# Altium PCB CH565W-R0-1v1.PcbDoc (part 4 of 4)
Units mil, origin at the board's own origin, x right, y up, seen from the top; angles counter-clockwise.
Board outline 3947.04 x 3947.04 mil, 4 copper layers (Top Layer, Layer 1, Layer 2, Bottom Layer), stack 23.756 mil thick; 204 components, 168 nets, 932 pads, 1005 vias.
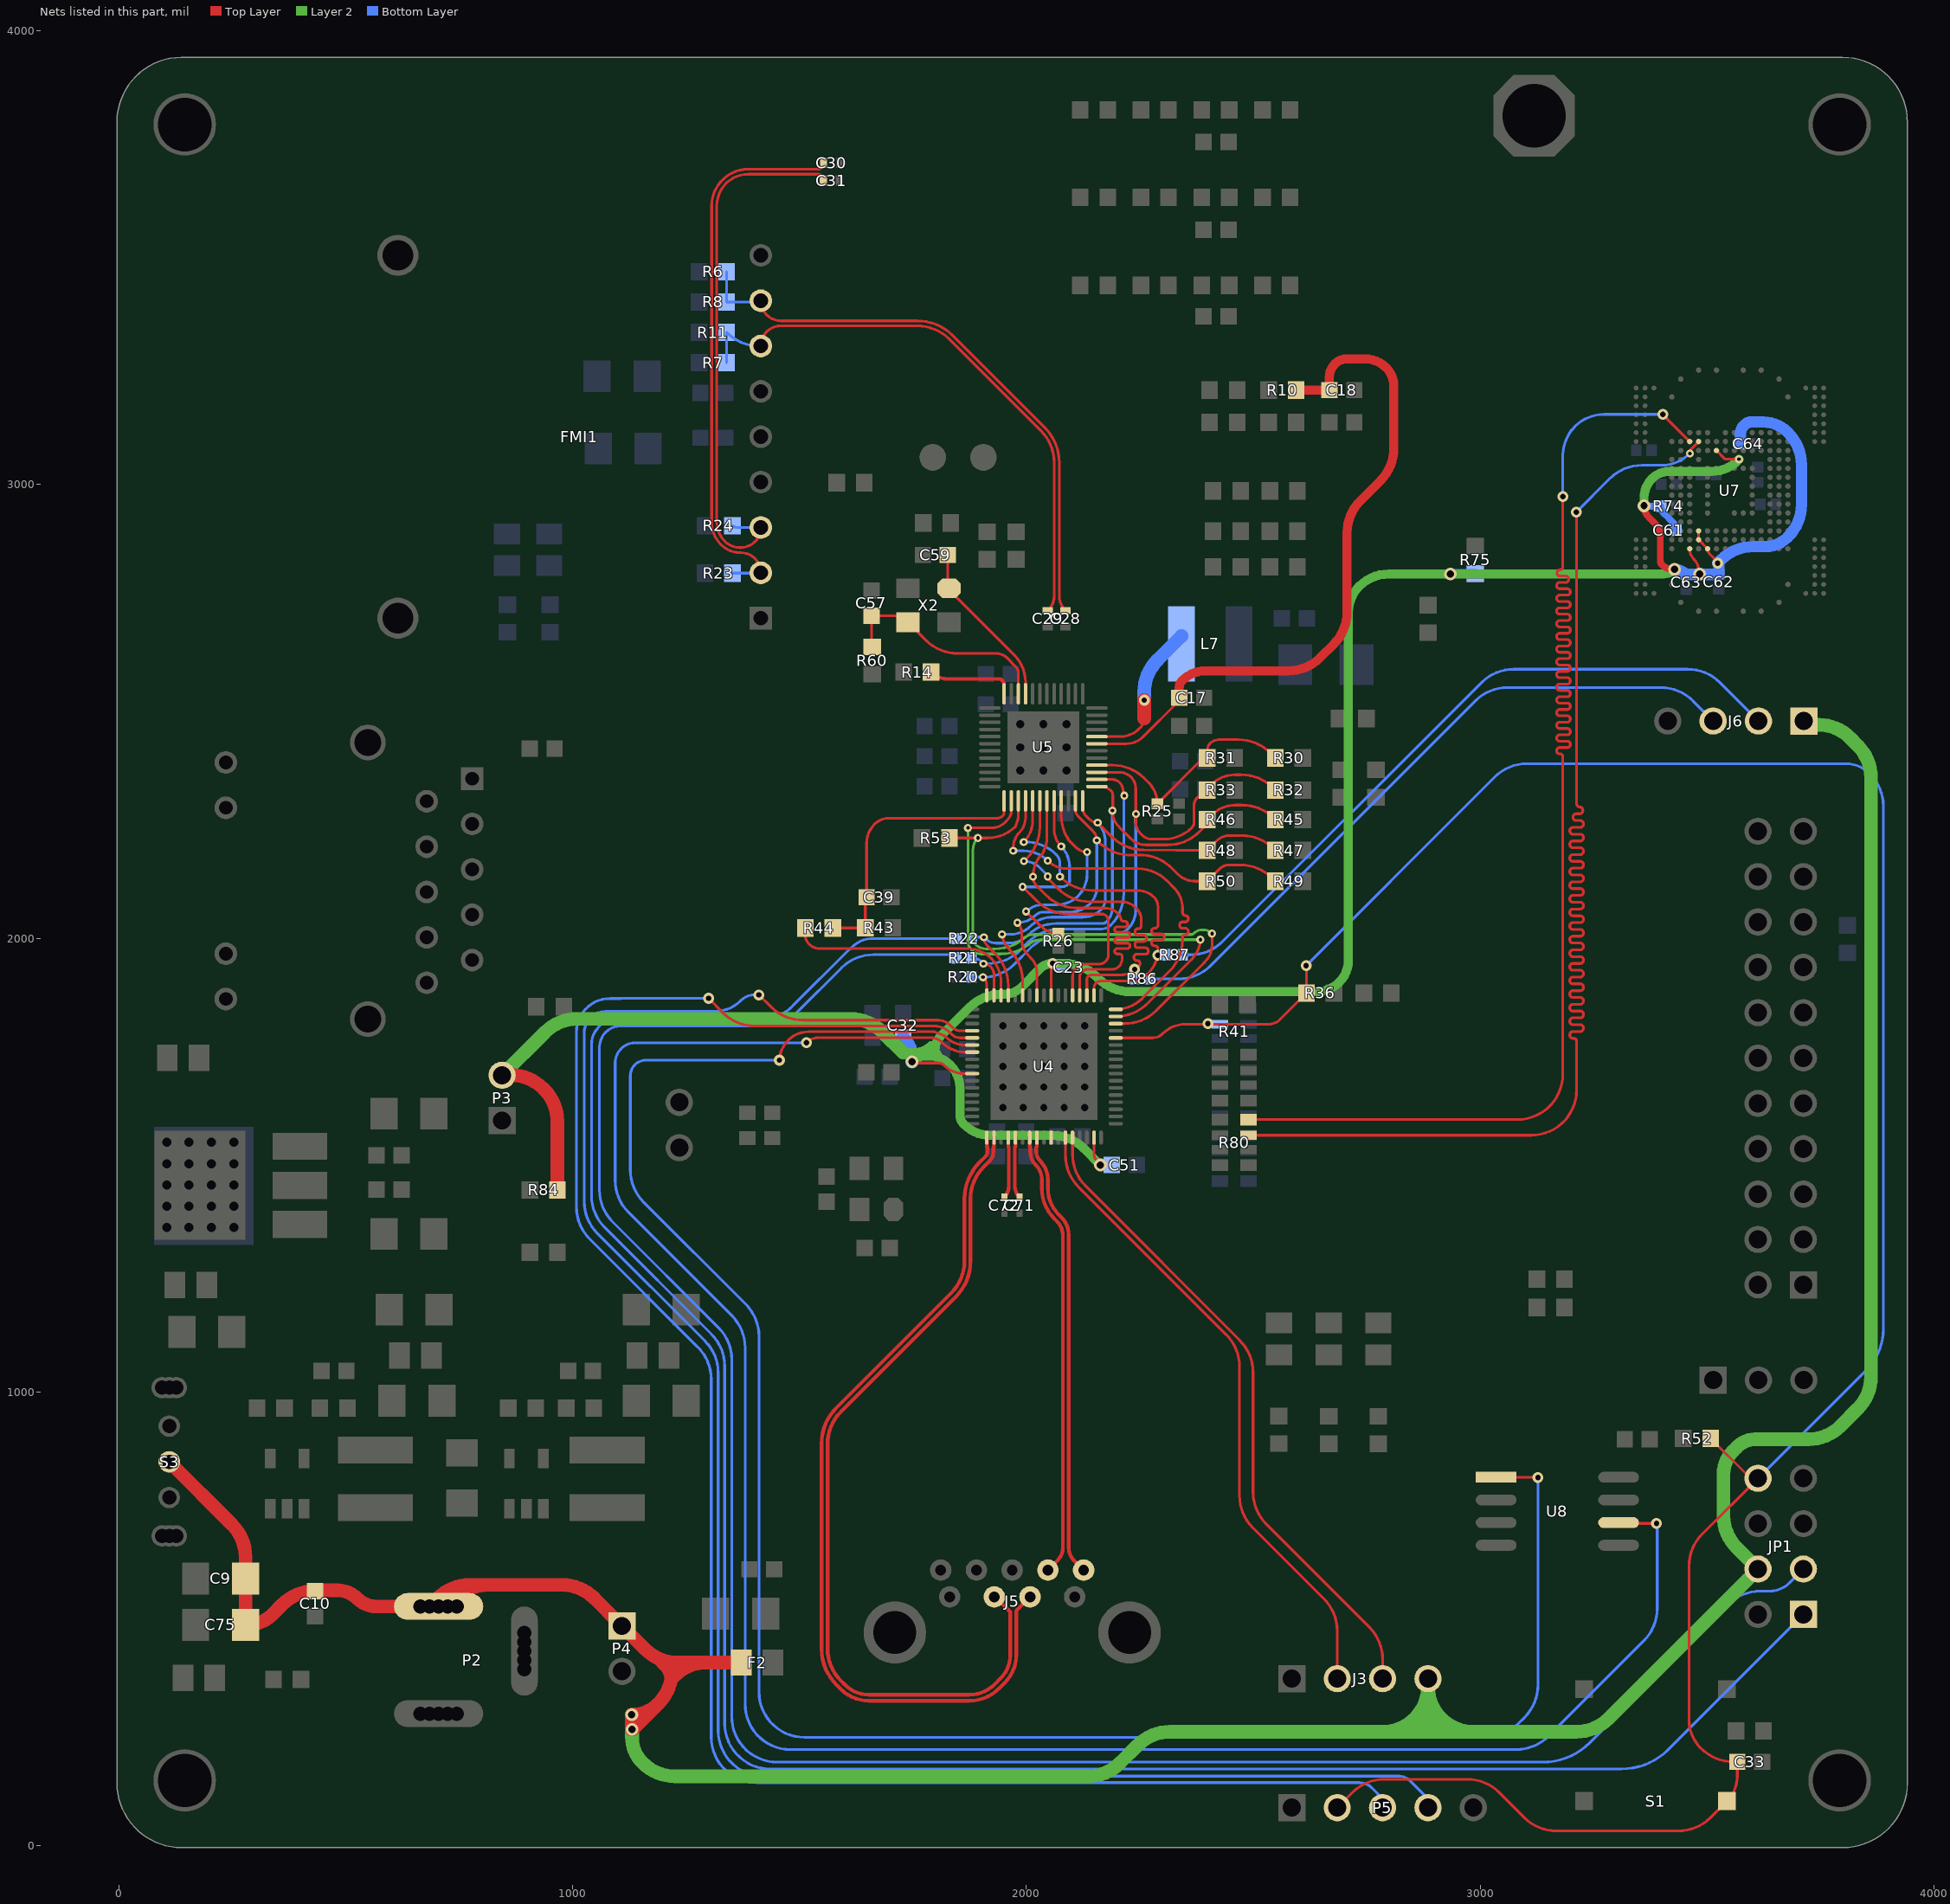
[diagram p6: the nets of this part, all layers, seen from the top]

## Via types
v1: diameter 17.72, hole 7.87, Top Layer to Bottom Layer, tented both sides, 564 vias
v2: diameter 24, hole 12, Top Layer to Bottom Layer, tented both sides, 371 vias
v3: diameter 28, hole 16, Top Layer to Bottom Layer, tented both sides, 64 vias
v4: diameter 26, hole 14, Top Layer to Bottom Layer, tented both sides, 2 vias
v5: diameter 19.68, hole 10, Top Layer to Bottom Layer, tented both sides, 1 vias
v6: diameter 20, hole 10, Top Layer to Bottom Layer, tented both sides, 1 vias
v7: diameter 32, hole 18, Top Layer to Bottom Layer, tented both sides, 1 vias
v8: diameter 17.72, hole 12, Top Layer to Bottom Layer, tented both sides, 1 vias

## Nets (pads, with @x,y where several pads share a name; then routed paths per layer and width w, separated by ;. In a path a pad name is that pad's centre, name@x,y a point inside that pad or via, vN(x,y) a via of type N, cw(c..) or ccw(c..) an arc to the next point about the centre after c; other vN are vias at no path point) (continued)
NetR80_7: R80.7 U7.J4 | length 3184.2
  Top Layer w6: R80.7@2489.51,1565.45 3112.82,1565.45 ccw(c3112.82,1665.45) 3212.82,1665.44 3212.82,1769.53 3212.82,1772.53 ccw(c3206.07,1772.53) 3206.07,1779.28 3204.57,1779.28 cw(c3204.57,1786.03) 3197.82,1786.03 3197.82,1787.53 cw(c3204.57,1787.53) 3204.57,1794.28 3221.07,1794.28 ccw(c3221.07,1801.03) 3227.82,1801.03 3227.82,1802.53 ccw(c3221.07,1802.53) 3221.07,1809.28 3204.57,1809.28 cw(c3204.57,1816.03) 3197.82,1816.03 3197.82,1817.53 cw(c3204.57,1817.53) 3204.57,1824.28 3221.07,1824.28 ccw(c3221.07,1831.03) 3227.82,1831.03 3227.82,1832.53 ccw(c3221.07,1832.53) 3221.07,1839.28 3204.57,1839.28 cw(c3204.57,1846.03) 3197.82,1846.03 3197.82,1847.53 cw(c3204.57,1847.53) 3204.57,1854.28 3221.07,1854.28 ccw(c3221.07,1861.03) 3227.82,1861.03 3227.82,1862.53 ccw(c3221.07,1862.53) 3221.07,1869.28 3204.57,1869.28 cw(c3204.57,1876.03) 3197.82,1876.03 3197.82,1877.53 cw(c3204.57,1877.53) 3204.57,1884.28 3221.07,1884.28 ccw(c3221.07,1891.03) 3227.82,1891.03 3227.82,1892.53 ccw(c3221.07,1892.53) 3221.07,1899.28 3204.57,1899.28 cw(c3204.57,1906.03) 3197.82,1906.03 3197.82,1907.53 cw(c3204.57,1907.53) 3204.57,1914.28 3221.07,1914.28 ccw(c3221.07,1921.03) 3227.82,1921.03 3227.82,1922.53 ccw(c3221.07,1922.53) 3221.07,1929.28 3204.57,1929.28 cw(c3204.57,1936.03) 3197.82,1936.03 3197.82,1937.53 cw(c3204.57,1937.53) 3204.57,1944.28 3221.07,1944.28 ccw(c3221.07,1951.03) 3227.82,1951.03 3227.82,1952.53 ccw(c3221.07,1952.53) 3221.07,1959.28 3204.57,1959.28 cw(c3204.57,1966.03) 3197.82,1966.03 3197.82,1967.53 cw(c3204.57,1967.53) 3204.57,1974.28 3221.07,1974.28 ccw(c3221.07,1981.03) 3227.82,1981.03 3227.82,1982.53 ccw(c3221.07,1982.53) 3221.07,1989.28 3204.57,1989.28 cw(c3204.57,1996.03) 3197.82,1996.03 3197.82,1997.53 cw(c3204.57,1997.53) 3204.57,2004.28 3221.07,2004.28 ccw(c3221.07,2011.03) 3227.82,2011.03 3227.82,2012.53 ccw(c3221.07,2012.53) 3221.07,2019.28 3204.57,2019.28 cw(c3204.57,2026.03) 3197.82,2026.03 3197.82,2027.53 cw(c3204.57,2027.53) 3204.57,2034.28 3221.07,2034.28 ccw(c3221.07,2041.03) 3227.82,2041.03 3227.82,2042.53 ccw(c3221.07,2042.53) 3221.07,2049.28 3204.57,2049.28 cw(c3204.57,2056.03) 3197.82,2056.03 3197.82,2057.53 cw(c3204.57,2057.53) 3204.57,2064.28 3221.07,2064.28 ccw(c3221.07,2071.03) 3227.82,2071.03 3227.82,2072.53 ccw(c3221.07,2072.53) 3221.07,2079.28 3204.57,2079.28 cw(c3204.57,2086.03) 3197.82,2086.03 3197.82,2087.53 cw(c3204.57,2087.53) 3204.57,2094.28 3221.07,2094.28 ccw(c3221.07,2101.03) 3227.82,2101.03 3227.82,2102.53 ccw(c3221.07,2102.53) 3221.07,2109.28 3204.57,2109.28 cw(c3204.57,2116.03) 3197.82,2116.03 3197.82,2117.53 cw(c3204.57,2117.53) 3204.57,2124.28 3221.07,2124.28 ccw(c3221.07,2131.03) 3227.82,2131.03 3227.82,2132.53 ccw(c3221.07,2132.53) 3221.07,2139.28 3204.57,2139.28 cw(c3204.57,2146.03) 3197.82,2146.03 3197.82,2147.53 cw(c3204.57,2147.53) 3204.57,2154.28 3221.07,2154.28 ccw(c3221.07,2161.03) 3227.82,2161.03 3227.82,2162.53 ccw(c3221.07,2162.53) 3221.07,2169.28 3204.57,2169.28 cw(c3204.57,2176.03) 3197.82,2176.03 3197.82,2177.53 cw(c3204.57,2177.53) 3204.57,2184.28 3221.07,2184.28 ccw(c3221.07,2191.03) 3227.82,2191.03 3227.82,2192.53 ccw(c3221.07,2192.53) 3221.07,2199.28 3204.57,2199.28 cw(c3204.57,2206.03) 3197.82,2206.03 3197.82,2207.53 cw(c3204.57,2207.53) 3204.57,2214.28 3221.07,2214.28 ccw(c3221.07,2221.03) 3227.82,2221.03 3227.82,2222.53 ccw(c3221.07,2222.53) 3221.07,2229.28 3204.57,2229.28 cw(c3204.57,2236.03) 3197.82,2236.03 3197.82,2237.53 cw(c3204.57,2237.53) 3204.57,2244.28 3221.07,2244.28 ccw(c3221.07,2251.03) 3227.82,2251.03 3227.82,2252.53 ccw(c3221.07,2252.53) 3221.07,2259.28 3211.72,2259.28 cw(c3211.72,2266.03) 3204.97,2266.03 3204.97,2267.53 cw(c3211.72,2267.53) 3211.72,2274.28 3219.57,2274.28 ccw(c3219.57,2281.03) 3226.32,2281.03 3226.32,2282.53 ccw(c3219.57,2282.53) 3219.57,2289.28 cw(c3219.57,2296.03) 3212.82,2296.03 3212.82,2345.59 3212.82,2348.59 v2@3212.82,2939.27 ; v1(3462.46,3068.75) 3464.7,3070.99 3464.7,3077.76 U7.J4@3481.78,3094.85
  Bottom Layer w6: v2(3211.9,2939.27) 3285.85,3013.21 cw(c3356.56,2942.5) 3356.56,3042.5 3399.09,3042.5 ccw(c3399.09,3132.11) v1(3462.46,3068.75)
NetR80_8: R80.8 U7.J3 | length 3166.7
  Top Layer w6: R80.8@2489.51,1600.1 3082.41,1600.1 ccw(c3082.41,1700.1) 3182.41,1700.1 3182.41,2397 3182.41,2400 ccw(c3176.11,2400) 3176.11,2406.3 3175.12,2406.3 cw(c3175.12,2412.6) 3168.82,2412.6 3168.82,2414 cw(c3175.12,2414) 3175.12,2420.3 3192.52,2420.3 ccw(c3192.52,2426.6) 3198.82,2426.6 3198.82,2428 ccw(c3192.52,2428) 3192.52,2434.3 3175.12,2434.3 cw(c3175.12,2440.6) 3168.82,2440.6 3168.82,2442 cw(c3175.12,2442) 3175.12,2448.3 3192.52,2448.3 ccw(c3192.52,2454.6) 3198.82,2454.6 3198.82,2456 ccw(c3192.52,2456) 3192.52,2462.3 3175.12,2462.3 cw(c3175.12,2468.6) 3168.82,2468.6 3168.82,2470 cw(c3175.12,2470) 3175.12,2476.3 3192.52,2476.3 ccw(c3192.52,2482.6) 3198.82,2482.6 3198.82,2484 ccw(c3192.52,2484) 3192.52,2490.3 3175.12,2490.3 cw(c3175.12,2496.6) 3168.82,2496.6 3168.82,2498 cw(c3175.12,2498) 3175.12,2504.3 3192.52,2504.3 ccw(c3192.52,2510.6) 3198.82,2510.6 3198.82,2512 ccw(c3192.52,2512) 3192.52,2518.3 3175.12,2518.3 cw(c3175.12,2524.6) 3168.82,2524.6 3168.82,2526 cw(c3175.12,2526) 3175.12,2532.3 3192.52,2532.3 ccw(c3192.52,2538.6) 3198.82,2538.6 3198.82,2540 ccw(c3192.52,2540) 3192.52,2546.3 3175.12,2546.3 cw(c3175.12,2552.6) 3168.82,2552.6 3168.82,2554 cw(c3175.12,2554) 3175.12,2560.3 3192.52,2560.3 ccw(c3192.52,2566.6) 3198.82,2566.6 3198.82,2568 ccw(c3192.52,2568) 3192.52,2574.3 3175.12,2574.3 cw(c3175.12,2580.6) 3168.82,2580.6 3168.82,2582 cw(c3175.12,2582) 3175.12,2588.3 3192.52,2588.3 ccw(c3192.52,2594.6) 3198.82,2594.6 3198.82,2596 ccw(c3192.52,2596) 3192.52,2602.3 3175.12,2602.3 cw(c3175.12,2608.6) 3168.82,2608.6 3168.82,2610 cw(c3175.12,2610) 3175.12,2616.3 3192.52,2616.3 ccw(c3192.52,2622.6) 3198.82,2622.6 3198.82,2624 ccw(c3192.52,2624) 3192.52,2630.3 3175.12,2630.3 cw(c3175.12,2636.6) 3168.82,2636.6 3168.82,2638 cw(c3175.12,2638) 3175.12,2644.3 3192.52,2644.3 ccw(c3192.52,2650.6) 3198.82,2650.6 3198.82,2652 ccw(c3192.52,2652) 3192.52,2658.3 3175.12,2658.3 cw(c3175.12,2664.6) 3168.82,2664.6 3168.82,2666 cw(c3175.12,2666) 3175.12,2672.3 3192.52,2672.3 ccw(c3192.52,2678.6) 3198.82,2678.6 3198.82,2680 ccw(c3192.52,2680) 3192.52,2686.3 3175.12,2686.3 cw(c3175.12,2692.6) 3168.82,2692.6 3168.82,2694 cw(c3175.12,2694) 3175.12,2700.3 3192.52,2700.3 ccw(c3192.52,2706.6) 3198.82,2706.6 3198.82,2708 ccw(c3192.52,2708) 3192.52,2714.3 3175.12,2714.3 cw(c3175.12,2720.6) 3168.82,2720.6 3168.82,2722 cw(c3175.12,2722) 3175.12,2728.3 3192.52,2728.3 ccw(c3192.52,2734.6) 3198.82,2734.6 3198.82,2736 ccw(c3192.52,2736) 3192.52,2742.3 3175.12,2742.3 cw(c3175.12,2748.6) 3168.82,2748.6 3168.82,2750 cw(c3175.12,2750) 3175.12,2756.3 3192.52,2756.3 ccw(c3192.52,2762.6) 3198.82,2762.6 3198.82,2764 ccw(c3192.52,2764) 3192.52,2770.3 3175.12,2770.3 cw(c3175.12,2776.6) 3168.82,2776.6 3168.82,2778 cw(c3175.12,2778) 3175.12,2784.3 3188.9,2784.3 ccw(c3188.9,2790.6) 3195.2,2790.6 3195.2,2792 ccw(c3188.9,2792) 3188.9,2798.3 3176.11,2798.3 cw(c3176.11,2804.6) 3169.81,2804.6 3169.81,2806 cw(c3176.11,2806) 3176.11,2812.3 ccw(c3176.11,2818.6) 3182.41,2818.6 3182.41,2937.19 v2(3182.41,2973.49) ; v2(3402.8,3154.97) 3402.8,3154.16 U7.J3@3462.1,3094.85
  Bottom Layer w6: v2(3182.41,2973.49) 3182.41,3064.16 cw(c3273.22,3064.16) 3273.22,3154.97 v2(3402.8,3154.97)
PA19: U4.10
PB24: R44.2 U4.49 | length 535
  Top Layer w6: R44.2@1512.38,2022.43 1512.38,2007.08 ccw(c1540.98,2007.08) 1520.75,1986.86 ccw(c1544.85,2010.95) 1544.85,1976.88 1870.85,1976.88 cw(c1870.85,1904.71) 1921.89,1955.74 cw(c1868.24,1902.09) 1944.11,1902.09 U4.49@1944.11,1873.9
PHYRSTB: C39.2 R43.1 R44.1 U5.13 | length 621.3
  Top Layer w6: R44.1@1573.01,2022.43 1642.99,2022.43 ccw(c1642.99,2024.94) R43.1@1644.77,2023.17 1644.77,2083.54 cw(c1654.35,2083.54) C39.2@1647.57,2090.31 1647.57,2189.92 1647.57,2209.43 cw(c1706.65,2209.43) 1664.88,2251.21 cw(c1697.2,2218.88) 1697.2,2264.59 1745.25,2264.59 1935.08,2264.59 ccw(c1935.08,2282.62) 1947.83,2269.87 ccw(c1941.09,2276.61) 1950.62,2276.61 U5.13@1950.62,2297.13
POW: C9.2 C10.2 C75.2 F2.2 J3.4 J6.1 JP1.4 P2.1 P4.1 S3.1 | length 7815.1
  Top Layer w30: S3.1@110.18,845.58 249.02,706.74 cw(c178.31,636.03) 278.31,636.03 C9.2@278.31,588.13 C75.2@278.31,486.14 282.16,486.14 ccw(c282.16,564.49) 337.56,509.09 359.63,531.15 cw(c430.34,460.44) 430.34,560.44 C10.2@431.73,560.44 ; C10.2@431.73,562.32 481.16,562.32 cw(c481.16,500.89) 524.6,544.33 ccw(c567.23,586.96) 567.23,526.67 P2.1@664.07,526.67 P2.1@684.07,526.67 ; P2.1@684.07,540.95 P2.1@684.07,526.67 ; P2.1@704.07,526.67 722.44,545.04 cw(c793.15,474.33) 793.15,574.33 ; P2.1@724.07,526.67 742.44,545.04 cw(c813.15,474.33) 813.15,574.33 ; 1187.97,311.98 1188.86,312.87 ccw(c1118.15,383.58) 1216.67,366.44 ; F2.2@1371.15,402.99 1294.64,402.99 ; P2.1@684.07,526.67 702.44,545.04 cw(c773.15,474.33) 773.15,574.33 793.15,574.33 ; 793.15,574.33 813.15,574.33 ; 813.15,574.33 976.1,574.33 cw(c976.1,474.33) 1046.81,545.04 P4.1@1108.22,483.63 1159.57,432.28 ccw(c1230.28,502.99) 1189.19,411.82 ; 1189.19,411.82 ccw(c1230.28,502.99) 1230.28,402.99 1237.56,402.99 ; 1189.19,411.82 1204.02,396.99 cw(c1173.47,366.44) 1216.67,366.44 ; 1216.67,366.44 ccw(c1118.15,383.58) 1218.15,383.58 cw(c1237.56,383.58) 1237.56,402.99 ; 1216.67,366.44 1223.93,373.7 cw(c1294.64,302.99) 1294.64,402.99 ; 1237.56,402.99 1294.64,402.99 ; v3(1129.84,287.9) ccw(c1129.84,370.1) 1187.94,311.95 1132.76,256.77 cw(c1130.21,259.32) v3(1130.21,255.71) 1130.21,287.54 v3(1129.84,287.9)
  Layer 2 w30: v3(1129.84,287.9) cw(c1126.07,284.13) 1131.41,284.13 1131.41,224.96 ; v3(1130.21,255.71) 1130.21,238.8 ccw(c1210.53,238.8) 1131.41,224.96 ; J3.4@2885.09,367.45 J3.4@2885.09,350.37 ; J6.1@3713.66,2478.72 3713.66,2470.27 3747,2470.27 cw(c3747,2373.81) 3815.2,2442.02 3832.46,2424.76 cw(c3761.75,2354.05) 3861.75,2354.05 3861.75,1033.06 cw(c3761.75,1033.06) 3832.46,962.35 3794.57,924.46 cw(c3723.86,995.17) 3723.86,895.17 3606.65,895.17 ccw(c3606.65,839.43) 3567.23,878.85 3557.83,869.44 ccw(c3608.84,818.44) 3536.7,818.44 3536.7,726.61 ccw(c3636.7,726.61) 3565.99,655.9 JP1.4@3612.66,609.23 3283.09,279.66 cw(c3212.38,350.37) 3212.38,250.37 2985.09,250.37 ; 1131.41,224.96 ccw(c1210.53,238.8) 1153.73,182 1154.11,181.62 ccw(c1224.82,252.33) 1224.82,152.33 2135.56,152.33 ccw(c2135.56,252.33) 2206.27,181.62 2245.73,221.08 cw(c2316.44,150.37) 2316.44,250.37 2785.09,250.37 ; 2785.09,250.37 ccw(c2785.09,350.37) J3.4@2885.09,350.37 ; 2785.09,250.37 2853.49,250.37 ; 2853.49,250.37 ccw(c2853.49,281.96) 2885.09,281.96 2885.09,299.15 ; 2853.49,250.37 2933.87,250.37 ; 2885.09,299.15 ccw(c2933.87,299.15) 2933.87,250.37 ; 2885.09,299.15 J3.4@2885.09,350.37 ; J3.4@2885.09,350.37 ccw(c2985.09,350.37) 2985.09,250.37 ; 2933.87,250.37 2985.09,250.37
REGOUT: L7.1 U5.32 | length 362
  Top Layer w6: U5.32@2155.35,2444.41 2206.47,2444.41 ccw(c2206.47,2504.19) 2248.74,2461.92 ccw(c2204.49,2506.17) 2267.07,2506.17 2267.07,2509.74
  Top Layer w30: 2259.69,2484.21 v2(2259.69,2524.71)
  Bottom Layer w30: v2(2259.69,2524.71) 2259.69,2542.66 cw(c2359.69,2542.66) 2288.98,2613.37 L7.1@2341.44,2665.83
RGMII_MDC: U4.33 U5.14 | length 1207.3
  Top Layer w6: v1(1871,2243) 1924.08,2243 1924.37,2243.29 ccw(c1924.37,2281.73) 1951.55,2254.55 ; 1951.56,2254.57 1959.29,2262.29 ; 1959.3,2262.3 ccw(c1942.19,2279.39) 1962.44,2266.18 ccw(c1942.19,2279.39) 1966.37,2279.39 U5.14@1966.37,2302.68 ; U4.33@2196.78,1827.36 ccw(c2196.78,1927) 2267.23,1856.54 2363.6,1952.91 ccw(c2314.1,2002.42) v1@2384.11,2002.42
  Layer 2 w6: v1(1871,2243) 1871,1993.43 ccw(c1899,1993.43) 1879.2,1973.63 ccw(c1899.3,1993.73) 1899.29,1965.3 1944,1965.3 ccw(c1944,2065.3) 2004.21,1985.46 ; v1(2383.28,1996.84) 2386.18,1993.94 ccw(c2379.17,1986.92) 2379.17,1996.84 2031.69,1996.84 ccw(c2031.69,1957.98) 2010.24,1990.39 ; 2004.21,1985.46 ccw(c1944,2065.3) 2010.24,1990.39 ; 2004.21,1985.46 cw(c2031.69,1957.98) 2010.24,1990.39
RGMII_MDIO: R53.2 U4.32 U5.15 | length 1306.6
  Top Layer w6: R53.2@1830.07,2220.81 1914.42,2220.81 ccw(c1914.42,2307.37) 1975.63,2246.16 ccw(c1920.26,2273.74) 1982.12,2273.74 U5.15@1982.12,2302.68 ; U4.32@2196.78,1811.61 2216.3,1811.61 ccw(c2216.3,1911.61) 2287.01,1840.9 2387.37,1941.26 ccw(c2316.66,2011.97) 2394.78,1949.54 ccw(c2360.44,1983.87) 2405.96,1966.95 ccw(c2360.44,1983.87) 2409,1983.87 v1(2409,2010)
  Layer 2 w6: v1(1893,2221) ccw(c1919.56,2194.44) 1882,2194.44 1882,2001.36 ccw(c1904.69,2001.36) 1888.64,1985.32 ccw(c1909.84,2006.52) 1909.84,1976.54 1930.17,1976.54 ccw(c1930.17,2076.54) 1996.78,2001.96 ; 1992.54,1998.37 cw(c2015.88,1975.03) 1996.78,2001.96 ; v1(2409,2010) ccw(c2386.59,1987.59) 2393.97,2018.41 2388.01,2018.41 ccw(c2388.01,1990.69) 2368.41,2010.29 cw(c2362.98,2015.73) 2362.98,2008.04 2015.88,2008.04 ccw(c2015.88,1975.03) 1996.78,2001.96
RGMII_RXC: R25.2 R30.2 R31.1 U5.28 | length 519.8
  Top Layer w6: U5.28@2155.35,2381.42 2189.52,2381.42 cw(c2189.52,2281.42) 2260.23,2352.13 2269.2,2343.16 cw(c2222.61,2296.57) R25.2@2288.5,2296.57 2383.21,2391.28 cw(c2398.43,2376.05) R31.1@2398.43,2397.59 2398.43,2413.55 cw(c2421.43,2413.55) 2405.17,2429.81 cw(c2424.04,2410.94) 2424.04,2437.62 2467.13,2437.62 cw(c2467.13,2337.62) 2537.84,2408.33 R30.2@2548.59,2397.59
RGMII_RXD0: R21.1 U4.50 U5.26 | length 795.6
  Top Layer w6: v1(1905.2,1943.91) cw(c1905.2,1921.68) 1920.92,1937.4 cw(c1902.98,1919.46) 1928.36,1919.46 U4.50@1928.36,1873.9 ; U5.26@2155.35,2349.93 2188.26,2349.93 cw(c2188.26,2324.79) 2206.04,2342.56 cw(c2190.38,2326.91) 2212.52,2326.91 v1@2212.52,2314.19
  Bottom Layer w6: R21.1@1878.52,1957.02 cw(c1878.52,1924.24) 1901.7,1947.42 v1(1905.2,1943.91) 1914.97,1943.91 ccw(c1914.97,2043.91) 1985.68,1973.2 2003.59,1991.11 cw(c2074.3,1920.4) 2074.3,2020.4 2166.88,2020.4 ccw(c2166.88,2046.35) 2185.23,2028 ccw(c2114.52,2098.71) 2214.52,2098.71 v1@2214.52,2314.19
  other v1: 2215.52,2314.19
RGMII_RXD1: R22.1 R45.2 R46.1 U4.48 U5.25 | length 1223.9
  Top Layer w6: v1(1905.97,2002.04) ccw(c1932.45,2002.04) 1913.73,1983.32 1930.56,1966.48 cw(c1859.85,1895.77) 1959.85,1895.77 U4.48@1959.85,1873.9 ; U5.25@2155.35,2334.18 2163.85,2334.18 cw(c2163.85,2301.73) 2186.8,2324.67 cw(c2178.22,2316.1) 2190.35,2316.1 v1@2190.35,2281.15 ; v1(2189.35,2281.15) ccw(c2240.43,2281.15) 2204.31,2245.04 2230.69,2218.67 ccw(c2262.13,2250.11) 2262.13,2205.64 2311.08,2205.64 ccw(c2311.08,2305.64) 2381.79,2234.93 2398.43,2251.58 cw(c2403.74,2251.58) R46.1@2399.98,2255.32 ; R46.1@2398.43,2261.58 2408.7,2271.85 cw(c2460.89,2219.66) 2460.89,2293.46 2475.28,2293.46 cw(c2475.28,2193.46) 2545.99,2264.17 R45.2@2548.59,2261.58 ; R45.2@2548.37,2251.79 R45.2@2548.59,2251.58
  Bottom Layer w6: R22.1@1879.11,1999.15 cw(c1887.36,1990.89) 1887.36,2002.57 1905.97,2002.57 1909.7,1998.84 ccw(c1933.3,2022.44) 1933.3,1989.06 1960.74,1989.06 ccw(c1960.74,2049.37) 2003.38,2006.73 cw(c2065.25,1944.86) 2065.25,2032.36 2167.01,2032.36 ccw(c2167.01,2046.23) 2176.81,2036.42 ccw(c2146.54,2066.69) 2189.35,2066.69 v1(2189.35,2281.15)
RGMII_RXD2: R47.2 R48.1 U4.46 U5.24 | length 1081
  Top Layer w6: v1(1946.21,2008.38) ccw(c2001.06,2014.78) 1962.02,1975.74 cw(c1957.77,1971.51) 1963.2,1974.06 cw(c1895.23,1906.1) 1991.35,1906.1 U4.46@1991.35,1873.9 ; U5.24@2123.85,2302.68 2123.85,2286.6 ccw(c2146.35,2286.6) 2125.74,2277.56 ccw(c2146.35,2286.6) 2130.44,2270.69 2138.9,2262.23 ccw(c2156.99,2280.32) v1(2156.99,2254.74) 2187.8,2223.93 ccw(c2258.51,2294.64) 2189.72,2222.06 ccw(c2258.51,2294.64) 2258.51,2194.64 cw(c2258.51,2188.64) 2258.6,2194.64 2398.43,2193.18 R48.1@2398.48,2193.17 ; R48.1@2398.43,2188.57 R48.1@2400.93,2191.07 ; R48.1@2398.43,2193.57 2419.69,2214.83 cw(c2447.24,2187.28) 2447.24,2226.24 2474.49,2226.24 cw(c2474.49,2126.24) 2545.2,2196.95 R47.2@2548.59,2193.57 ; R47.2@2548.45,2188.71 R47.2@2548.59,2188.57
  Bottom Layer w6: v1(1946.21,2008.38) 1963.48,2008.38 ccw(c1963.48,2075.18) 2010.71,2027.95 cw(c2054.88,1983.78) 2054.88,2046.24 2123.69,2046.24 ccw(c2123.69,2104.35) 2164.77,2063.26 ccw(c2143.93,2084.11) 2173.41,2084.11 2173.41,2215.1 ccw(c2117.35,2215.1) 2170.67,2232.4 ccw(c2117.35,2215.1) v1(2156.99,2254.74)
RGMII_RXD3: R49.2 R50.1 U4.44 U5.23 | length 1039.2
  Top Layer w6: v1(1980.11,2034.15) cw(c1956.73,2010.77) 1989.79,2010.77 1989.79,1994.93 ccw(c2034.68,1994.93) 2002.94,1963.18 2010.28,1955.84 ; 2010.31,1955.81 cw(c1979.95,1925.51) 2022.85,1925.51 U4.44@2022.85,1873.9 ; U5.23@2108.1,2302.68 2108.1,2283.07 ccw(c2128.79,2283.07) 2114.16,2268.45 2146.73,2235.88 cw(c2126.67,2215.82) 2155.04,2215.82 2158.5,2212.35 ccw(c2229.21,2283.06) 2216.03,2183.93 ccw(c2229.21,2283.06) 2229.21,2183.06 2249.83,2183.06 ; 2249.83,2183.67 cw(c2249.83,2083.67) 2320.54,2154.38 2333.88,2141.05 ccw(c2371.26,2178.44) 2371.26,2125.57 R50.1@2398.43,2125.57 ; R50.1@2399.78,2126.12 ccw(c2399.78,2124.22) R50.1@2398.43,2125.57 ; R49.2@2534.74,2127.17 cw(c2531.62,2122.04) R49.2@2535.79,2126.36 ; R49.2@2548.59,2125.57 2541.95,2132.2 ccw(c2471.24,2061.49) 2471.24,2161.49 2447.02,2161.49 ccw(c2447.02,2130.92) 2425.4,2152.54 R50.1@2398.43,2125.57
  Bottom Layer w6: v1(1980.11,2034.15) ccw(c1980.11,2091.39) 2020.58,2050.91 cw(c2036.32,2035.17) 2036.32,2057.43 2094.78,2057.43 ccw(c2094.78,2121.85) 2140.33,2076.3 ccw(c2104.82,2111.81) 2155.04,2111.81 v1(2155.04,2215.81)
RGMII_RXDV: R20.1 R32.2 R33.1 U4.51 U5.27 | length 1274.3
  Top Layer w6: v1(1904.17,1913.87) v1@1906.35,1911.69 ; v1@1906.36,1911.68 cw(c1891.23,1896.58) 1912.61,1896.58 U4.51@1912.61,1873.9 ; U5.27@2155.35,2365.67 2205.11,2365.67 cw(c2205.11,2330.04) 2230.31,2355.24 cw(c2204.41,2329.35) 2241.03,2329.35 2241.03,2255.21 ccw(c2274.2,2255.21) 2241.07,2253.52 ccw(c2274.2,2255.21) 2250.75,2231.76 2255.66,2226.84 ccw(c2276.33,2247.51) 2276.33,2218.28 2303.29,2218.28 ccw(c2303.29,2305.2) 2364.76,2243.74 ccw(c2353.42,2255.08) 2369.45,2255.08 2369.45,2292.92 cw(c2392.89,2292.92) 2376.32,2309.5 cw(c2388.59,2297.22) 2388.59,2314.58 ccw(c2388.59,2326.98) R33.1@2397.36,2318.21 ; R33.1@2398.43,2329.58 2407.07,2338.22 cw(c2460.47,2284.81) 2412.17,2342.87 cw(c2460.47,2284.81) 2439.18,2357.27 cw(c2460.47,2284.81) 2460.47,2360.34 2473.41,2360.34 cw(c2473.41,2260.34) 2544.12,2331.05 R32.2@2548.59,2326.58
  Bottom Layer w6: R20.1@1878.26,1914.38 1902.93,1914.38 cw(c1902.93,1912.63) v1(1904.17,1913.87) ccw(c1904.17,2011.04) 1972.88,1942.33 2009.71,1979.15 cw(c2080.42,1908.44) 2080.42,2008.44 2194.57,2008.44 ccw(c2194.57,2049.8) 2223.82,2020.55 ccw(c2182.26,2062.11) 2241.03,2062.11 v1@2241.03,2274.73
  other v1: 2241.27,2273.78
RGMII_TXC: R26.1 U5.21 | length 454.9
  Top Layer w6: v1(1999,2059) 2030.93,2027.07 ccw(c2070.34,2066.47) R26.1@2070.34,2010.74 ; U5.21@2076.61,2302.68 2076.61,2271.32 ccw(c2175.85,2271.32) 2093.76,2215.54 2109.38,2199.92 ccw(c2133.68,2224.22) v1(2133.68,2189.86)
  Bottom Layer w6: v1(1999,2059) 2001.14,2059 2002.6,2060.47 cw(c2033.9,2029.17) 2033.9,2073.43 2066.42,2073.43 ccw(c2066.42,2140.5) 2067.99,2073.45 ccw(c2066.42,2140.5) 2113.84,2093.07 ccw(c2065.96,2140.96) 2123.95,2106 ccw(c2065.96,2140.96) 2133.68,2140.96 v1(2133.68,2189.86)
RGMII_TXD0: U4.38 U5.19 | length 814.7
  Top Layer w6: U5.19@2045.11,2302.68 2045.11,2221.89 cw(c1976.86,2221.89) 2035.06,2186.24 ccw(c2085,2136.31) 2024.92,2173.43 ccw(c2085,2136.31) 2014.38,2136.31 v1(2014.38,2135.57) ccw(c2044.14,2135.57) 2023.1,2114.53 2042.03,2095.59 ccw(c2112.74,2166.31) 2104.85,2066.62 ccw(c2112.74,2166.31) 2112.74,2066.31 2171.45,2066.31 cw(c2171.45,2021.65) 2199.12,2056.7 cw(c2171.45,2021.65) 2202.55,2053.7 2203.03,2053.23 2205.63,2050.23 2208.63,2041.22 ccw(c2214.32,2043.12) 2214.32,2037.12 2216.97,2037.12 cw(c2216.97,2031.12) 2216.97,2025.12 2200.23,2025.12 ccw(c2200.23,2019.12) 2200.23,2013.12 2222.23,2013.12 cw(c2222.23,2007.12) 2222.23,2001.12 2200.23,2001.12 ccw(c2200.23,1995.12) 2200.23,1989.12 2222.23,1989.12 cw(c2222.23,1983.12) 2222.23,1977.12 2200.23,1977.12 ccw(c2200.23,1971.12) 2200.23,1965.12 2205.23,1965.12 cw(c2205.23,1959.12) 2211.23,1959.12 2211.23,1956.12 cw(c2184.69,1956.12) 2203.46,1937.35 cw(c2189.47,1951.34) 2189.47,1931.55 2134.43,1931.55 ccw(c2134.43,1914.46) 2117.33,1914.46 U4.38@2117.33,1873.9
RGMII_TXD1: R86.2 U4.37 U5.18 | length 844.9
  Top Layer w6: v1@1997.88,2172.71 2000.07,2174.9 ccw(c1929.36,2245.61) 2029.36,2245.61 U5.18@2029.36,2302.68 ; v1(2047,2136) 2047,2131.8 2069.14,2109.66 ccw(c2139.85,2180.37) 2102.62,2087.56 ccw(c2139.85,2180.37) 2139.85,2080.37 2209.91,2080.37 cw(c2209.91,2037.36) 2240.32,2067.77 2243.48,2064.61 cw(c2220.67,2041.8) 2252.93,2041.8 2252.93,2027.05 cw(c2246.63,2027.05) 2246.63,2020.75 2245.64,2020.75 ccw(c2245.64,2014.45) 2239.34,2014.45 2239.34,2013.05 ccw(c2245.64,2013.05) 2245.64,2006.75 2258.53,2006.75 cw(c2258.53,2000.45) 2264.83,2000.45 2264.83,1999.05 cw(c2258.53,1999.05) 2258.53,1992.75 2245.53,1992.75 ccw(c2245.53,1986.45) 2239.23,1986.45 2239.23,1985.05 ccw(c2245.53,1985.05) 2245.53,1978.75 2262.18,1978.75 cw(c2262.18,1972.45) 2268.48,1972.45 2268.48,1971.05 cw(c2262.18,1971.05) 2262.18,1964.75 2243.23,1964.75 ccw(c2243.23,1958.45) 2236.93,1958.45 2236.93,1957.05 ccw(c2243.23,1957.05) 2243.23,1950.75 2244.22,1950.75 cw(c2244.22,1944.45) 2250.33,1942.92 2249.92,1941.3 cw(c2227.46,1953.31) v2@2248.04,1938.3 ; U4.37@2133.08,1873.9 2133.08,1908.63 cw(c2143.36,1908.63) 2143.36,1918.91 2205.9,1918.91 ccw(c2205.9,1974.87) v2@2245.47,1935.3
  Bottom Layer w6: v1(1994.23,2169.79) cw(c1994.23,2119.75) 2029.61,2155.13 2045.77,2138.98 cw(c2042.79,2136) v1(2047,2136) ; R86.2@2237.41,1908.43 ccw(c2233.78,1912.06) R86.2@2238.91,1912.06 ; R86.2@2238.41,1910.43 2238.41,1931.24 v2(2238.47,1931.3)
RGMII_TXD2: R87.2 U4.36 U5.17 | length 832
  Top Layer w6: v1(1994,2212) ccw(c1946.65,2259.35) 2011.1,2241.16 ccw(c1946.65,2259.35) 2013.61,2259.35 U5.17@2013.61,2302.68 ; v1(2073.85,2135.56) 2074.86,2134.55 ccw(c2145.57,2205.26) 2106.6,2113.16 ccw(c2145.57,2205.26) 2145.57,2105.26 2244.54,2105.26 cw(c2244.54,2052.92) 2281.55,2089.93 cw(c2261.58,2069.95) 2288.68,2077.93 cw(c2261.58,2069.95) 2289.39,2074.93 2289.83,2069.95 2289.83,2028.65 cw(c2283.33,2028.65) 2283.33,2022.15 2282.33,2022.15 ccw(c2282.33,2015.65) 2282.33,2009.15 2297.33,2009.15 cw(c2297.33,2002.65) 2297.33,1996.15 2282.33,1996.15 ccw(c2282.33,1989.65) 2282.33,1983.15 2283.33,1983.15 cw(c2283.33,1976.65) 2289.83,1976.65 2289.83,1973.65 cw(c2218.94,1973.65) 2269.07,1923.53 cw(c2225.05,1967.55) 2225.05,1905.3 2163.44,1905.3 ccw(c2163.44,1890.69) 2148.83,1890.69 U4.36@2148.83,1873.9
  Bottom Layer w6: v1(1994,2212) 1999.49,2212 cw(c1999.49,2119.28) 2015.93,2210.53 cw(c1999.49,2119.28) 2065.05,2184.84 cw(c2043.81,2163.6) 2073.85,2163.6 v1(2073.85,2135.56)
  other v2: 2289.77,1962.47
RGMII_TXD3: U4.34 U5.16 | length 883.7
  Top Layer w6: v1(1970.69,2192.57) 1970.69,2199.91 cw(c2017.46,2199.91) 1984.39,2232.98 ccw(c1951.85,2265.52) 1997.87,2265.52 U5.16@1997.87,2302.68 ; v1(2046.96,2170.77) ccw(c2088.81,2212.62) 2088.81,2153.43 2245.15,2153.43 cw(c2245.15,2062.58) 2309.39,2126.82 2325.85,2110.36 cw(c2281.96,2066.47) 2344.03,2066.47 2344.03,2056.09 ccw(c2350.33,2056.09) 2350.33,2049.79 cw(c2350.33,2043.49) 2356.63,2043.49 2356.63,2042.09 cw(c2350.33,2042.09) 2350.33,2035.79 2344.03,2035.79 ccw(c2344.03,2029.49) 2337.73,2029.49 2337.73,2028.09 ccw(c2344.03,2028.09) 2344.03,2021.79 2350.33,2021.79 cw(c2350.33,2015.49) 2356.63,2015.49 2356.63,2014.09 cw(c2350.33,2014.09) 2350.33,2007.79 ccw(c2350.33,2001.49) 2344.03,2001.49 2344.03,1997.4 2343.18,1984.34 cw(c2244.03,1997.4) 2342.73,1981.34 cw(c2244.03,1997.4) 2314.74,1926.69 2255.47,1867.42 cw(c2196.78,1926.12) U4.34@2196.78,1843.11
  Bottom Layer w6: v1(1970.69,2192.57) 1994.33,2192.57 cw(c1994.33,2118.14) v1(2046.96,2170.77)
RGMII_TXEN: U4.39 U5.20 | length 736.2
  Top Layer w6: v1(1991.54,2113.09) 2022.22,2082.4 ccw(c2092.93,2153.12) 2092.93,2053.12 2166.06,2053.12 cw(c2166.06,2038.67) 2180.5,2038.67 2180.5,1963.46 cw(c2160.01,1963.46) 2160.01,1942.96 2130.03,1942.96 ccw(c2130.03,1914.51) 2109.93,1934.65 ; U5.20@2060.86,2302.68 2060.86,2240.33 ccw(c2114.69,2240.33) v1(2076.62,2202.26) ; U4.39@2101.59,1873.9 2101.59,1914.55 cw(c2129.99,1914.55) 2109.89,1934.62
  Bottom Layer w6: v1(1991.54,2113.09) 2077.64,2113.09 ccw(c2077.64,2133.78) 2092.27,2119.15 ccw(c2085.73,2125.7) 2094.99,2125.7 2094.99,2157.93 ccw(c2032.29,2157.93) v1(2076.62,2202.26)
RSET: R14.1 U5.48 | length 194.7
  Top Layer w8: R14.1@1791.7,2586.75 R14.1@1789.55,2586.75 ccw(c1826.16,2623.36) 1826.16,2571.58 1939.3,2571.58 cw(c1939.3,2561.55) 1946.4,2568.65 cw(c1936.21,2558.45) 1950.62,2558.45 U5.48@1950.62,2538.9
RST#: C33.1 JP1.8 P5.2 R36.2 R41.7 R52.1 S1.1 U4.30 | length 5538.4
  Top Layer w6: U4.30@2196.78,1780.11 2277.48,1780.11 ccw(c2277.48,1812.38) 2300.29,1789.56 cw(c2350.58,1739.27) 2350.58,1810.4 2534.8,1810.4 ccw(c2534.8,1843.47) 2539.26,1810.7 ccw(c2534.8,1843.47) 2558.18,1820.08 R36.2@2617.23,1879.13 2617.23,1937.81 ccw(c2614.75,1937.81) v2(2616.5,1939.56) ; P5.2@2685.09,83.11 2718.38,116.4 cw(c2789.1,45.69) 2789.1,145.69 2971.69,145.69 cw(c2971.69,45.69) 3042.4,116.4 3097.62,61.19 ccw(c3168.33,131.9) 3168.33,31.9 3436.99,31.9 ccw(c3436.99,131.9) 3507.7,61.19 S1.1@3544.26,97.75 ; R52.1@3508.47,897.08 3584.77,820.78 ccw(c3612.66,848.67) JP1.8@3612.66,809.23 3489.88,686.45 ccw(c3560.59,615.74) 3460.59,615.74 3460.59,276.54 ccw(c3548.17,276.54) 3486.24,214.61 3487.37,213.48 ccw(c3558.08,284.19) 3558.08,184.19 C33.1@3567.1,184.19 3567.1,152.88 cw(c3489.13,152.88) S1.1@3544.26,97.75 ; S1.1@3544.26,97.75 ccw(c3489.13,152.88) S1.1@3544.26,97.75
  Bottom Layer w6: v2(2616.5,1939.56) 2989.48,2312.54 3032.43,2355.49 cw(c3103.14,2284.77) 3103.14,2384.77 3805.98,2384.77 cw(c3805.98,2309.93) 3858.9,2362.85 3859.65,2362.1 cw(c3788.94,2291.39) 3888.94,2291.39 3888.94,2234.14 3888.94,1137.8 cw(c3762.68,1137.8) 3851.96,1048.52 JP1.8@3612.66,809.23
  other v2: 2399.88,1811.81
RX_N: C31.2 FMI1.3 R24.2 | length 1199.5
  Top Layer w6.07: FMI1.3@1414.36,2905.51 cw(c1369.89,2905.51) 1369.89,2861.05 1368.23,2861.05 cw(c1368.33,2907.77) 1335.29,2874.73 cw(c1379.02,2918.47) 1317.17,2918.47 1317.17,3614.48 cw(c1387.03,3614.48) 1387.03,3684.34 1541.31,3684.34 cw(c1541.31,3678.28) 1545.6,3682.57 cw(c1541.31,3678.28) 1547.38,3678.28 1547.38,3678.01 ccw(c1554.09,3678.01) 1549.33,3673.27 C31.2@1552.22,3670.39
  Bottom Layer w6.07: R24.2@1351.81,2909.48 ccw(c1361.39,2919.06) 1361.39,2905.51 FMI1.3@1414.36,2905.51
RX_P: C30.2 FMI1.2 R23.2 | length 1233.8
  Top Layer w6.07: FMI1.2@1414.36,2805.51 ccw(c1369.89,2805.51) 1369.89,2849.98 1368.22,2849.98 cw(c1368.22,2907.51) 1327.54,2866.83 1326.36,2868.01 cw(c1375.25,2916.9) 1306.11,2916.9 1306.11,3614.51 cw(c1387,3614.51) 1387,3695.41 1541.5,3695.41 ccw(c1541.5,3701.48) 1545.79,3697.19 ccw(c1541.5,3701.48) 1547.57,3701.48 1547.57,3701.75 cw(c1554.28,3701.75) 1549.52,3706.48 C30.2@1552.41,3709.37
  Bottom Layer w6.07: R23.2@1351.81,2804.76 1412.56,2804.76 ccw(c1412.56,2807.31) FMI1.2@1414.36,2805.51
RXD: J3.3 U4.13 | length 1465.9
  Top Layer w6.07: U4.13@2101.59,1560.34 2101.59,1523.38 ccw(c2201.59,1523.38) 2130.88,1452.67 2470.32,1113.22 cw(c2399.61,1042.51) 2499.61,1042.51 2499.61,778.61 ; 2499.61,785.74 2499.61,778.61 ; J3.3@2785.09,367.45 2785.09,410.3 ccw(c2685.09,410.3) 2755.8,481.01 2528.9,707.9 cw(c2599.61,778.61) 2499.61,778.61
RXD3: J6.2 R87.1 | length 1565.2
  Bottom Layer w6: R87.1@2343.67,1963.28 2361.42,1963.28 ccw(c2361.42,2063.28) 2432.13,1992.57 3003.2,2563.64 cw(c3073.91,2492.93) 3073.91,2592.93 3458.03,2592.93 cw(c3458.03,2492.93) 3528.74,2563.64 J6.2@3613.66,2478.72
SCK: JP1.3 R21.2 | length 5042.1
  Bottom Layer w6: R21.2@1845.06,1957.02 ccw(c1829.09,1941.05) 1829.09,1963.64 1662.63,1963.64 ccw(c1662.63,1863.64) 1591.92,1934.35 1493.31,1835.73 cw(c1422.6,1906.44) 1422.6,1806.44 1105.55,1806.44 ccw(c1105.55,1759.64) 1058.74,1759.64 1058.74,1444.99 ccw(c1158.74,1444.99) 1088.03,1374.28 1321.14,1141.18 cw(c1250.43,1070.47) 1350.43,1070.47 1350.43,283.41 ccw(c1450.43,283.41) 1450.43,183.41 1523.26,183.41 3138.29,183.41 ccw(c3138.29,329.54) 3241.62,226.21 3546.44,531.03 cw(c3617.15,460.32) 3617.15,560.32 3637.22,560.32 ccw(c3637.22,624.38) 3682.52,579.08 JP1.3@3712.66,609.23
SCK1: U4.58 U8.6 | length 4839.8
  Top Layer w6.07: v2(1514.84,1769.42) cw(c1541.84,1742.42) 1541.84,1780.6 1787.66,1780.6 cw(c1787.66,1741.44) 1815.35,1769.13 ccw(c1864.88,1818.66) 1834.55,1755.52 ccw(c1864.88,1818.66) 1864.88,1748.62 U4.58@1880.41,1748.62 ; U8.6@3305.36,711.58 ccw(c3309.89,716.1) 3309.89,709.7 v2(3388.95,709.7)
  Bottom Layer w6.07: v2(1514.84,1769.42) 1137.63,1769.42 ccw(c1137.63,1725.12) 1093.33,1725.12 1093.33,1466.23 ccw(c1193.33,1466.23) 1122.62,1395.52 1350.48,1167.66 cw(c1279.77,1096.95) 1379.77,1096.95 1379.77,311.29 ccw(c1479.77,311.29) 1479.77,211.29 1544.5,211.29 3079.78,211.29 ccw(c3079.78,311.29) 3150.49,240.58 3361.11,451.2 ccw(c3290.4,521.91) 3390.4,521.91 3390.4,713.58 ccw(c3393.91,710.07) 3388.95,710.07 v2(3388.95,709.7)
SCS: JP1.1 R22.2 | length 5082.4
  Bottom Layer w6: R22.2@1845.64,1999.15 1661.55,1999.15 ccw(c1661.55,1933.81) 1656.28,1998.94 ccw(c1661.55,1933.81) 1615.35,1980.01 ccw(c1676.7,1901.04) 1605.99,1971.75 1484.71,1850.47 cw(c1414,1921.18) 1436.47,1823.74 cw(c1414,1921.18) 1414,1821.18 1097.13,1821.18 ccw(c1097.13,1765.11) 1041.05,1765.11 1041.05,1432.91 ccw(c1141.05,1432.91) 1070.34,1362.2 1305.42,1127.12 cw(c1234.71,1056.41) 1334.71,1056.41 1334.71,268.59 ccw(c1434.71,268.59) 1434.71,168.59 1508.57,168.59 3312.03,168.59 ccw(c3312.03,313.43) 3414.45,211.01 JP1.1@3712.66,509.23
SCS1#: U4.57 U8.1 | length 4673.3
  Top Layer w6.07: v2@1455.36,1727.73 cw(c1522.38,1727.73) 1474.99,1775.12 cw(c1520.1,1730.01) 1520.1,1793.81 1795.68,1793.81 cw(c1795.68,1787.74) 1798.03,1793.33 1818.01,1785.03 cw(c1815.71,1779.42) 1820,1783.71 ccw(c1866.77,1830.57) 1866.77,1764.37 U4.57@1880.41,1764.37 ; U8.1@3035.36,811.58 3125.6,811.58 cw(c3125.6,808.94) 3127.47,810.8 v2(3127.56,810.71)
  Bottom Layer w6.07: v2(1455.36,1731.09) 1160.92,1731.09 ccw(c1160.92,1696.98) 1126.81,1696.98 1126.81,1488.58 ccw(c1226.81,1488.58) 1156.1,1417.87 1381.1,1192.87 cw(c1310.38,1122.16) 1410.38,1122.16 1410.38,338.23 ccw(c1510.38,338.23) 1510.38,238.23 3012.35,238.23 ccw(c3012.35,338.23) 3083.06,267.52 3098.27,282.73 ccw(c3027.56,353.44) 3127.56,353.44 v2(3127.56,810.71)
SSRX_n: J5.5 U4.8 | length 985.6
  Top Layer w8.22: U4.8@2022.85,1560.34 2022.85,1541.7 cw(c2018.53,1541.7) 2021.58,1538.64 2021.58,1529.22 ccw(c2049.8,1529.22) 2029.85,1509.26 ; 2029.87,1509.24 cw(c1988.02,1467.44) 2047.17,1467.44 2047.17,1448.37 ccw(c2129.04,1448.37) 2071.15,1390.48 2076.91,1384.72 cw(c2037.49,1345.3) 2093.24,1345.3 2093.24,655.69 ccw(c2131.79,655.69) 2104.53,628.43 J5.5@2126,606.96
SSRX_p: J5.6 U4.7 | length 985.6
  Top Layer w8.22: U4.7@2007.1,1560.34 2007.1,1541.7 ccw(c2011.41,1541.7) 2008.36,1538.64 2008.36,1529.22 ccw(c2049.8,1529.22) 2020.5,1499.91 ; 2020.52,1499.89 cw(c1988.02,1467.44) 2033.95,1467.44 2033.95,1448.37 ccw(c2129.04,1448.37) 2061.8,1381.14 2067.56,1375.38 cw(c2037.49,1345.3) 2080.02,1345.3 2080.02,655.69 cw(c2041.46,655.69) 2068.73,628.43 J5.6@2047.26,606.96
SSTX_n: C71.1 U4.5 | length 134.3
  Top Layer w8.22: U4.5@1975.6,1560.34 1975.6,1541.7 cw(c1971.29,1541.7) 1974.34,1538.64 1974.34,1453.61 ccw(c2009.07,1453.61) C71.1@1984.51,1429.06
SSTX_p: C72.1 U4.4 | length 134.3
  Top Layer w8.22: C72.1@1951.01,1429.06 ccw(c1926.62,1453.45) 1961.12,1453.45 1961.12,1538.64 cw(c1964.17,1541.7) 1959.85,1541.7 U4.4@1959.85,1560.34
TCK: P5.4 U4.55 | length 4267.9
  Top Layer w6.07: v2(1410.11,1875) 1436.63,1848.48 ccw(c1507.34,1919.19) 1507.34,1819.19 ; 1552.79,1819.19 1507.34,1819.19 ; U4.55@1880.41,1795.86 1854.81,1795.86 cw(c1854.81,1821.25) 1836.86,1803.3 1832.05,1808.11 ccw(c1805.3,1781.36) 1805.3,1819.19 1507.34,1819.19
  Bottom Layer w6.07: v2(1410.11,1875) 1399.92,1875 ccw(c1399.92,1833.73) 1370.74,1862.91 cw(c1311.51,1922.14) 1311.51,1838.38 1070.6,1838.38 ccw(c1070.6,1792.91) 1038.45,1825.06 ccw(c1070.63,1792.88) 1025.12,1792.88 1025.12,1744.67 ccw(c1031.09,1743.57) 1025.02,1743.57 1025.02,1419.79 ccw(c1125.02,1419.79) 1054.31,1349.08 1291.19,1112.2 cw(c1220.48,1041.49) 1320.48,1041.49 1320.48,252.55 ccw(c1420.48,252.55) 1420.48,152.55 2821.8,152.55 cw(c2821.8,120.43) 2841.96,145.43 ; 2842.5,145.01 2842.08,145.43 2841.96,145.43 ; 2842.6,144.96 2842.95,144.96 2843.35,144.57 ; 2843.38,144.57 2843.44,144.51 2843.68,144.51 2844.5,143.69 ; 2844.54,143.66 2849.9,138.3 ; P5.4@2885.09,103.11 2849.9,138.3 ; 2841.96,145.43 cw(c2779.19,67.59) 2849.9,138.3
TIO: P5.3 U4.56 | length 4182.2
  Top Layer w6.07: v2(1299.17,1867.38) 1331,1835.55 ccw(c1401.71,1906.26) 1401.71,1806.26 ; 1421.27,1806.26 1401.71,1806.26 ; U4.56@1880.41,1780.11 1853.43,1780.11 cw(c1853.43,1804.05) 1836.5,1787.13 1832.64,1790.98 ccw(c1795.75,1754.1) 1795.75,1806.26 1401.71,1806.26
  Bottom Layer w6.07: v2(1299.17,1867.38) 1107.78,1867.38 ccw(c1107.78,1861.31) 1106.04,1867.13 1082.17,1867.13 ccw(c1082.17,1792.74) 1007.78,1792.74 1007.78,1407.73 ccw(c1107.78,1407.73) 1037.07,1337.02 1275.69,1098.4 cw(c1204.98,1027.69) 1304.98,1027.69 1304.98,238.45 ccw(c1404.98,238.45) 1376.5,142.59 ccw(c1404.98,238.45) 1404.98,138.45 2733.88,138.45 cw(c2733.88,100.15) 2760.96,127.23 P5.3@2785.09,103.11
TX_N: C29.2 FMI1.7 R7.1 R11.1 | length 1292.9
  Top Layer w6.07: FMI1.7@1414.36,3305.51 cw(c1458.82,3305.51) 1458.82,3349.98 1759,3349.98 cw(c1759,3249.98) 1829.71,3320.69 2031.91,3118.49 cw(c1961.2,3047.78) 2061.2,3047.78 2061.2,2755.86 cw(c2013.5,2755.86) C29.2@2047.23,2722.14
  Bottom Layer w6.07: R7.1@1338.98,3268.74 R11.1@1338.98,3335.66 1339.84,3334.8 ccw(c1410.55,3405.51) 1410.55,3305.51 FMI1.7@1414.36,3305.51
TX_P: C28.2 FMI1.8 R6.1 R8.1 | length 1303.8
  Top Layer w6.07: FMI1.8@1414.36,3405.51 ccw(c1458.82,3405.51) 1458.82,3361.05 1759.04,3361.05 cw(c1759.04,3250.08) 1837.5,3328.54 2039.85,3126.2 cw(c1961.6,3047.94) 2072.27,3047.94 2072.27,2755.86 ccw(c2119.96,2755.86) C28.2@2086.24,2722.14
  Bottom Layer w6.07: R6.1@1338.98,3469.48 R8.1@1338.98,3402.57 1411.42,3402.57 ccw(c1411.42,3405.51) FMI1.8@1414.36,3405.51
TXD: J3.2 U4.12 | length 1486.4
  Top Layer w6.07: U4.12@2085.84,1560.34 2085.84,1522.04 ccw(c2185.84,1522.04) 2115.13,1451.33 2440.39,1126.07 cw(c2369.68,1055.36) 2469.68,1055.36 2469.68,770.76 ; 2469.68,816.85 2469.68,770.76 ; J3.2@2685.09,351.05 J3.2@2685.09,367.45 2685.09,472.51 ccw(c2585.09,472.51) 2655.8,543.22 2498.97,700.05 cw(c2569.68,770.76) 2469.68,770.76
TXD3: J6.3 R86.1 | length 1526.5
  Bottom Layer w6: R86.1@2270.88,1908.43 R86.1@2271.88,1908.43 ; R86.1@2271.88,1910.43 2335.49,1910.43 ccw(c2335.49,2010.43) 2382.05,1921.93 ccw(c2335.49,2010.43) 2406.2,1939.72 2989.76,2523.28 cw(c3060.47,2452.57) 3060.47,2552.57 3398.39,2552.57 cw(c3398.39,2452.57) 3469.1,2523.28 J6.3@3513.66,2478.72
UD_n: J5.2 U4.2 | length 1913.1
  Top Layer w8.22: U4.2@1928.36,1560.34 1928.36,1541.7 cw(c1924.04,1541.7) 1927.09,1538.64 1927.09,1528.22 cw(c1901.28,1528.22) 1919.53,1509.97 1905.95,1496.39 ccw(c1976.66,1425.67) 1876.66,1425.67 1876.66,1288.61 cw(c1763.44,1288.61) 1843.5,1208.55 1590.72,955.76 ccw(c1661.43,885.05) 1561.43,885.05 1561.43,433.81 ccw(c1661.43,433.81) 1590.72,363.1 1600.01,353.8 ccw(c1652.94,406.73) 1652.94,331.88 1873.62,331.88 ccw(c1873.62,411.88) 1930.19,355.31 1942.92,368.04 ccw(c1891.13,419.83) 1964.37,419.83 1964.37,514.71 J5.2@1932.61,546.48
UD_p: J5.3 U4.1 | length 1955.1
  Top Layer w8.22: U4.1@1912.61,1560.34 1912.61,1541.7 ccw(c1916.93,1541.7) 1913.87,1538.64 1913.87,1528.22 cw(c1901.28,1528.22) 1910.18,1519.31 1896.6,1505.73 ccw(c1976.66,1425.68) 1863.44,1425.68 1863.44,1288.61 cw(c1763.44,1288.61) 1834.15,1217.9 1581.37,965.11 ccw(c1661.43,885.05) 1548.21,885.05 1548.21,433.81 ccw(c1661.43,433.81) 1581.37,353.75 1590.66,344.45 ccw(c1652.94,406.73) 1652.94,318.66 1873.62,318.66 ccw(c1873.62,411.88) 1939.54,345.96 1952.27,358.69 ccw(c1891.13,419.83) 1977.59,419.83 1977.59,514.71 cw(c1984.61,514.71) 1979.65,519.67 J5.3@2007.89,547.91
VDDREG: C17.2 C18.2 R10.2 U5.31 | length 1535.1
  Top Layer w6: U5.31@2155.35,2428.67 2219.98,2428.67 ccw(c2219.98,2481.02) 2257,2444 2332.04,2519.04 ccw(c2321.06,2530.02) C17.2@2336.58,2530.02
  Top Layer w20: C17.2@2336.58,2530.02 2336.58,2551.91 cw(c2359.27,2551.91) 2343.23,2567.96 cw(c2395.05,2516.13) 2395.05,2589.42 2577.02,2589.42 ccw(c2577.02,2689.42) 2647.73,2618.71 2677.59,2648.57 ccw(c2606.88,2719.29) 2706.88,2719.29 2706.88,2893.73 cw(c2806.88,2893.73) 2736.17,2964.44 2780.51,3008.77 ccw(c2709.79,3079.48) 2809.79,3079.48 2809.79,3217.78 ccw(c2753.62,3217.78) 2793.34,3257.5 ccw(c2745.62,3209.79) 2745.62,3277.27 2706.6,3277.27 ccw(c2706.6,3239.78) 2680.09,3266.29 ccw(c2710.18,3236.19) 2667.62,3236.19 C18.2@2667.62,3208.28 R10.2@2594.58,3208.28
VIO: C23.1 C32.1 C51.2 C61.1 C62.1 C63.1 C64.1 P3.2 R74.1 R75.1 R84.2 U4.16 U4.42 U4.61 U7.AA3 U7.AA5 U7.K6 U7.W4 U7.Y4 | length 6315.5
  Top Layer w6: v3@1757.78,1724.81 1806.07,1724.81 cw(c1806.07,1706.71) 1818.87,1719.51 ccw(c1862.66,1763.3) 1862.66,1701.37 U4.61@1880.41,1701.37 ; U4.42@2054.34,1873.9 v2@2054.34,1937.87 ; U4.16@2148.83,1560.34 2148.83,1523.7 ccw(c2166.77,1523.7) 2154.09,1511.01 ; U7.AA3@3462.1,2858.63 ccw(c3496.25,2858.63) 3472.1,2834.48 cw(c3458.12,2820.5) 3472.14,2834.44 cw(c3448.59,2810.9) 3481.89,2810.9 v3@3481.89,2802.64 ; U7.W4@3481.78,2898 U7.Y4@3481.78,2878.31 U7.AA5@3501.47,2858.63 ccw(c3517.56,2858.63) 3506.18,2847.24 v2@3523.09,2830.34 ; U7.K6@3521.15,3075.16 3540.48,3055.83 v1(3570.78,3055.83)
  Top Layer w15: v3(3361.42,2953.27) ccw(c3396.99,2953.27) 3371.84,2928.12 3385.39,2914.57 cw(c3356.72,2885.9) 3397.26,2885.9 3397.26,2832.44 ccw(c3410.77,2832.44) 3401.22,2822.88 ccw(c3425.06,2846.72) 3425.06,2813.01 v3(3428.69,2813.01)
  Top Layer w30: P3.2@843.97,1697.92 864.03,1697.92 cw(c864.03,1597.92) 934.74,1668.63 936.64,1666.73 cw(c865.93,1596.02) 965.93,1596.02 R84.2@965.93,1445.02
  Layer 2 w20: 1728.01,1747.59 1752.52,1747.59 ccw(c1752.52,1800) 1789.58,1762.94 ; v3(1747.78,1727.81) cw(c1777.91,1697.69) 1756.39,1734.46 ccw(c1756.39,1745.81) 1764.42,1737.78 1764.89,1738.25 cw(c1777.91,1697.69) 1777.91,1740.29 1784.54,1740.29 cw(c1784.54,1674.13) 1809.01,1735.6 ; v3(2163.09,1500.01) 2127.31,1535.79 ccw(c2056.6,1465.08) 2056.6,1565.08 1921,1565.08 cw(c1921,1647.98) 1862.39,1589.36 cw(c1884.44,1611.41) 1853.25,1611.41 1853.25,1669.77 ccw(c1782.73,1669.77) 1832.6,1719.64 1831.32,1720.91 ccw(c1784.54,1674.13) 1809.01,1735.6 ; v3(3361.42,2953.27) 3361.42,2971 cw(c3420.85,2971) 3378.83,3013.03 cw(c3417.86,2973.99) 3417.86,3029.19 3510.43,3029.19 ccw(c3510.43,3110.59) 3567.98,3053.03 v1(3570.78,3055.83) ; v3(3428.69,2813.01) cw(c3404.34,2837.36) 3404.34,2802.92 v3(2934.8,2802.92) 2798.91,2802.92 ccw(c2798.91,2710.66) 2733.67,2775.9 ccw(c2791.49,2718.08) 2711.51,2735.08 ccw(c2791.49,2718.08) 2709.72,2718.08 2709.72,2670.44 2709.72,1951.97 cw(c2639.77,1951.97) 2639.77,1882.01 2228.6,1882.01 cw(c2228.6,1982.01) 2157.89,1911.3 2153.87,1915.32 ccw(c2083.16,1844.61) 2083.16,1944.61 v2(2057.59,1944.61) ccw(c2057.59,1906.37) 2030.55,1933.41 1989.74,1892.6 cw(c1950.35,1931.99) 1950.35,1876.29 1944.34,1876.29 ccw(c1944.34,1776.29) 1873.63,1847 1811.42,1784.78 ccw(c1842.82,1753.4) 1798.43,1753.85 ccw(c1838.03,1764.62) 1809.01,1735.6
  Layer 2 w30: P3.2@843.97,1697.92 938.84,1792.79 cw(c1009.55,1722.08) 1009.55,1822.08 1612.1,1822.08 cw(c1612.1,1722.08) 1682.81,1792.79 1728.01,1747.59
  Bottom Layer w15: v3(3361.42,2953.27) ccw(c3363.81,2955.66) 3363.81,2952.28 R74.1@3398.87,2952.28 ccw(c3421.61,2952.28) 3405.53,2936.2 3425.31,2916.42 cw(c3408.35,2899.46) C61.1@3432.34,2899.46
  Bottom Layer w20: v3(2934.8,2802.92) cw(c2936.61,2801.11) 2936.61,2803.67 R75.1@2989.6,2803.67
  Bottom Layer w25: v3(3428.69,2813.01) cw(c3428.69,2778.64) 3453,2802.94 C63.1@3454.09,2801.85 3524.91,2801.85 ccw(c3524.91,2803.57) 3526.13,2802.36 3526.13,2821.09 ccw(c3518.22,2821.09) v2(3523.81,2826.68) 3531.14,2834 cw(c3601.85,2763.29) 3601.85,2863.29 3628.57,2863.29 ccw(c3628.57,2932.77) 3677.71,2883.64 3679.2,2885.14 ccw(c3608.49,2955.85) 3708.49,2955.85 3708.49,3043.45 ccw(c3608.49,3043.45) 3679.2,3114.16 3677.24,3116.13 ccw(c3624.62,3063.51) 3624.62,3137.93 3597.13,3137.93 ccw(c3597.13,3119.47) 3584.08,3132.52 3580.65,3129.09 ccw(c3597.3,3112.44) 3573.76,3112.44 C64.1@3573.76,3090.21
  Bottom Layer w30: C32.1@1727.98,1780.45 cw(c1680.17,1732.64) 1747.78,1732.64 v3(1747.78,1727.81)
  other v3: 3483.89,2802.64
XTAL1: C57.2 R60.1 U5.46 X2.3 | length 486.5
  Top Layer w6: R60.1@1659.93,2643.05 cw(c1663.54,2646.66) 1658.43,2646.66 C57.2@1658.43,2711.06 1703.73,2711.06 cw(c1703.73,2661.55) X2.3@1738.73,2696.56 1778.26,2657.04 ccw(c1848.97,2727.75) 1848.97,2627.75 1934.08,2627.75 cw(c1934.08,2596.04) 1956.5,2618.46 1976.99,2597.97 cw(c1964.63,2585.6) 1977.88,2597.01 cw(c1964.63,2585.6) 1982.12,2585.6 U5.46@1982.12,2538.9
XTAL2: C59.2 U5.45 X2.1 | length 372.5
  Top Layer w6: C59.2@1826.58,2844.91 1826.58,2777.9 ccw(c1835.82,2777.9) X2.1@1829.29,2771.36 ccw(c1837.64,2771.36) 1831.73,2765.45 1972.8,2624.38 cw(c1912.3,2563.88) 1997.87,2563.88 U5.45@1997.87,2538.9
pads on no net: FMI1.10 FMI1.11 S3.0 S3.3 U2. U5.33 U6.0 U7. U7.A4 U7.A6 U7.A9 U7.A11 U7.AA1 U7.AA7 U7.AA8 U7.AA9 U7.AA10 U7.AA11 U7.AA12 U7.AA13 U7.AA14 U7.AE1 U7.AE14 U7.AG2 U7.AG13 U7.AH4 U7.AH6 U7.AH9 U7.AH11 U7.B2 U7.B13 U7.D1 U7.D14 U7.H7 U7.H8 U7.H9 U7.H10 U7.H11 U7.H12 U7.H13 U7.H14 U7.J1 U7.J7 U7.J8 U7.J9 U7.J10 U7.J11 U7.J12 U7.J13 U7.J14 U7.K5 U7.K7 U7.K8 U7.K9 U7.K10 U7.K11 U7.K12 U7.K13 U7.K14 U7.L1 U7.L2 U7.L4 U7.L12 U7.L13 U7.L14 U7.M1 U7.M2 U7.M3 U7.M5 U7.M8 U7.M9 U7.M10 U7.M12 U7.M13 U7.M14 U7.N1 U7.N2 U7.N3 U7.N10 U7.N12 U7.N13 U7.N14 U7.P1 U7.P2 U7.P3 U7.P10 U7.P12 U7.P13 U7.P14 U7.R1 U7.R2 U7.R3 U7.R12 U7.R13 U7.R14 U7.T1 U7.T2 U7.T3 U7.T5 U7.T12 U7.T13 U7.T14 U7.U1 U7.U2 U7.U3 U7.U10 U7.U12 U7.U13 U7.U14 U7.V1 U7.V2 U7.V3 U7.V12 U7.V13 U7.V14 U7.W1 U7.W2 U7.W3 U7.W7 U7.W8 U7.W9 U7.W10 U7.W11 U7.W12 U7.W13 U7.W14 U7.Y1 U7.Y3 U7.Y6 U7.Y7 U7.Y8 U7.Y9 U7.Y10 U7.Y11 U7.Y12 U7.Y13 U7.Y14

## Polygon pours and split planes (outlines as drawn)
GND on Top Layer "GND_L01_P000" (hatched Horizontal grid 8 track 8, remove dead copper, pour order 0): -24.84,3942.86 cw(c-71,3896.69) -5.71,3896.69 -5.71,-11.83 3952.68,-11.83 cw(c3952.68,-18.69) 3957.53,-13.84 3957.53,3943.06
GND on Layer 1 "GND_L02_P001" (hatched Horizontal grid 8 track 8, remove dead copper, pour order 1): -26.69,3956.56 -26.69,47.68 ccw(c55.3,47.68) -2.67,-10.29 cw(c20.51,-33.47) 20.51,-0.68 3959.37,-0.68 3959.37,3910.18 ccw(c3893.78,3910.18) 3940.16,3956.56
GND on Layer 2 "GND_L03_P002" (hatched Horizontal grid 8 track 8, remove dead copper, pour order 2): -25.16,3959.15 ccw(c-9.73,3943.72) -31.56,3943.72 -31.56,-16.73 3948.07,-16.73 ccw(c3948.07,5.09) 3963.5,-10.34 cw(c3994.37,20.52) 3950.72,20.52 3950.72,3959.15
GND on Bottom Layer "GND_L04_P003" (hatched Horizontal grid 8 track 8, remove dead copper, pour order 3): -20.72,-1.71 3913.51,-1.71 ccw(c3913.51,47.62) 3948.4,12.74 3956.83,21.17 ccw(c3886.12,91.88) 3986.12,91.88 3986.12,3987.55 23.84,3987.55 ccw(c23.84,3908.09) -32.35,3964.27

## Keep-outs
Keep-Out Layer:
  lines w8: 0,137.8 ccw(c137.8,137.8) 137.8,0 3799.21,0 ccw(c3799.21,137.8) 3937.01,137.8 3937.01,3799.21 ccw(c3799.21,3799.21) 3799.21,3937.01 137.79,3937.01 ccw(c137.79,3799.21) 0,3799.21 0,137.8

## Other copper
Top Layer:
  rectangle net GND: 2729.88,2890.17 2958.31,2906.17
  pour cut-out: 980.85,906.17 980.85,706.17 cw(c1000.17,686.85) 1000.17,714.17 1170.21,714.17 1170.21,906.17
  pour cut-out: 1944.15,1436.75 1991.15,1436.75 1991.15,1385.76 1944.15,1385.76
  pour cut-out: 2097.37,2729.44 2097.37,2679.2 2035.79,2679.2 2035.79,2729.64
  pour cut-out: 1544.94,3720.53 1595.18,3720.53 1595.18,3658.94 1544.74,3658.94
  pour cut-out: 2960.43,2894.98
  pour cut-out: 2958.31,2852.68 2958.31,2814.43 3020.9,2814.43 3020.9,2852.3
  pour cut-out: 2854.02,2762.17 2854.02,2643.36 2916.61,2643.36 2916.61,2764.61
  pour cut-out: 469.91,906.17 659.26,906.17 659.26,706.17 469.91,706.17
Layer 1:
  rectangle net GND: 1937.86,2316.87 2147.87,2526.88
  rectangle net GND: 1912.41,1583.51 2196.17,1847.73
  pour cut-out: 2103.23,2734.57 2103.23,2674.41 2032.82,2674.41 2033.23,2734.41
  pour cut-out: 1539.97,3726.36 1600.14,3726.36 1600.14,3655.95 1540.14,3656.36
  pour cut-out: 1362.96,1539.16 1460.96,1539.16 1460.96,1635.16 1362.96,1635.16
Layer 2:
  rectangle net GND: 1923.95,1606.62 2177.12,1828.86
  rectangle net GND: 1947.26,2335.9 2138.01,2510.51
Bottom Layer:
  rectangle net GND: 1957.53,2344.55 2125.65,2505.83
  rectangle net GND: 1923.66,1593.26 2151.61,1830
  pour cut-out: 2307.74,2743.5 2510.13,2743.5 2510.13,2554.15 2307.74,2554.15
Multi-Layer:
  pour cut-out: 55.98,1599.86 55.98,1304.8 311.61,1304.8 311.61,1599.37

## Silkscreen, mask and mechanical layers (free items; w line width, h text height)
Top Overlay:
  circle w10: c144.36,3793.89 r118.11
  circle w10: c3792.65,3793.89 r118.11
  circle w10: c144.36,143.12 r118.11
  circle w10: c3792.65,143.12 r118.11
  region: 2564.33,2060.37 2535.29,2013.45 2594.57,2013.45
  lines w8: 2369.6,2069.8 2639.31,2069.8 ; 2566.18,2039.46 2566.18,1953.98 2685.29,1953.98 ; 2651.29,1953.98 2870.66,1953.98 2870.66,2209.92 2651.29,2209.92 2651.29,1953.98
  text "CH565W-R0-1v1" at 2960.49,3545.69 h50
  text "RXD3" at 3562.63,2546.69 h32
  text "TXD3" at 3430.15,2546.11 h32
  text "POW" at 3679.99,2546.11 h32
  text "GND" at 3332.85,2545.53 h32
  text "D10" at 3453.39,2217.34 h32
  text "D11" at 3774.84,2211.87 h32
  text "D8" at 3480.05,2116.98 h32
  text "D9" at 3774.84,2114.8 h32
  text "PWDN" at 3416.07,2016.63 h32
  text "CLK" at 3448.06,1916.27 h32
  text "D7" at 3774.84,1914.49 h32
  text "D6" at 3480.05,1815.91 h32
  text "D5" at 3774.84,1814.68 h32
  text "D4" at 3480.05,1715.55 h32
  text "D3" at 3774.84,1712.82 h32
  text "VIO" at 908.08,1680.61 h32
  text "D2" at 3480.05,1615.2 h32
  text "D1" at 3774.84,1615.06 h32
  text "3V3" at 909.83,1575.38 h32
  text "D0" at 3480.05,1514.84 h32
  text "RESET" at 3774.84,1510.46 h32
  text "SDA" at 3448.06,1414.48 h32
  text "HERF" at 3774.84,1413.56 h32
  text "SCL" at 3448.06,1314.12 h32
  text "SYNC" at 3774.84,1310.29 h32
  text "GND" at 3448.06,1213.77 h32
  text "5V" at 3480.73,1089.66 h32
  text "3V3" at 3672.88,1089.66 h32
  text "ON" at 202.61,971.97 h40 r270
  text "OFF" at 202.61,850.76 h40 r270
  text "RST" at 3453.38,792.21 h32
  text "MOSI" at 3774.98,787.86 h32
  text "GND" at 3453.38,689.99 h32
  text "MISO" at 3774.98,687.09 h32
  text "POW" at 3453.38,587.77 h32
  text "SCK" at 3774.98,586.32 h32
  text "3V3" at 3453.38,485.55 h32
  text "SCS" at 3774.98,485.55 h32
  text "POW" at 955.44,467.16 h32
  text "GND" at 2529.67,427.32 h32
  text "TXD" at 2636.43,427.32 h32
  text "RXD" at 2745.05,427.32 h32
  text "POW" at 2853.67,427.32 h32
  text "DOWNLOAD" at 3257.79,427.37 h32
  text "GND" at 951.61,362.9 h32
  text "RST" at 3256.4,178.71 h32
  text "GND" at 2524.59,147.57 h32
  text "RST" at 2634.14,147.57 h32
  text "TIO" at 2737.76,147.57 h32
  text "TCK" at 2839.67,147.57 h32
  text "3V3" at 2940.73,147.57 h32
Mechanical 1:
  lines w10: 0,137.56 ccw(c137.68,137.68) 137.8,0 3799.21,0 ; 0,137.8 0,3799.21 ; 0,3799.54 cw(c137.63,3799.38) 137.79,3937.01 ; 136.97,3937.01 3799.21,3937.01 ; 3799.5,0 ccw(c3799.36,137.65) 3937.01,137.8 3937.01,3799.21 ccw(c3799.21,3799.21) 3799.21,3937.01 ; 3799.21,3937.01 3799.21,3937.01

## Text inside footprints (layer, text, board x,y; h text height)
D1: Top Overlay "+" at 94.89,356.47 h40 r90
D2: Top Overlay "+" at 60.45,1723 h40 r90
D3: Top Overlay "+" at 2570.03,1036.15 h40 r180
D4: Top Overlay "+" at 2679.4,1036.15 h40 r180
D5: Top Overlay "+" at 2788.77,1036.15 h40 r180
J5: Bottom Overlay "V" at 1842.59,390.43 h31.5 r90; Bottom Overlay "D-" at 1941.02,390.43 h31.5 r90; Bottom Overlay "D+" at 2019.76,390.43 h31.5 r90; Bottom Overlay "G" at 2118.18,390.43 h31.5 r90; Bottom Overlay "R-" at 2137.87,449.48 h31.5 r90; Bottom Overlay "R+" at 2059.13,449.48 h31.5 r90; Bottom Overlay "G" at 1980.39,449.48 h31.5 r90; Bottom Overlay "T-" at 1901.65,449.48 h31.5 r90; Bottom Overlay "T+" at 1822.91,449.48 h31.5 r90
U5: Top Overlay "1" at 1872.13,2499.41 h30